# Allegro board BP2_02V5.brd
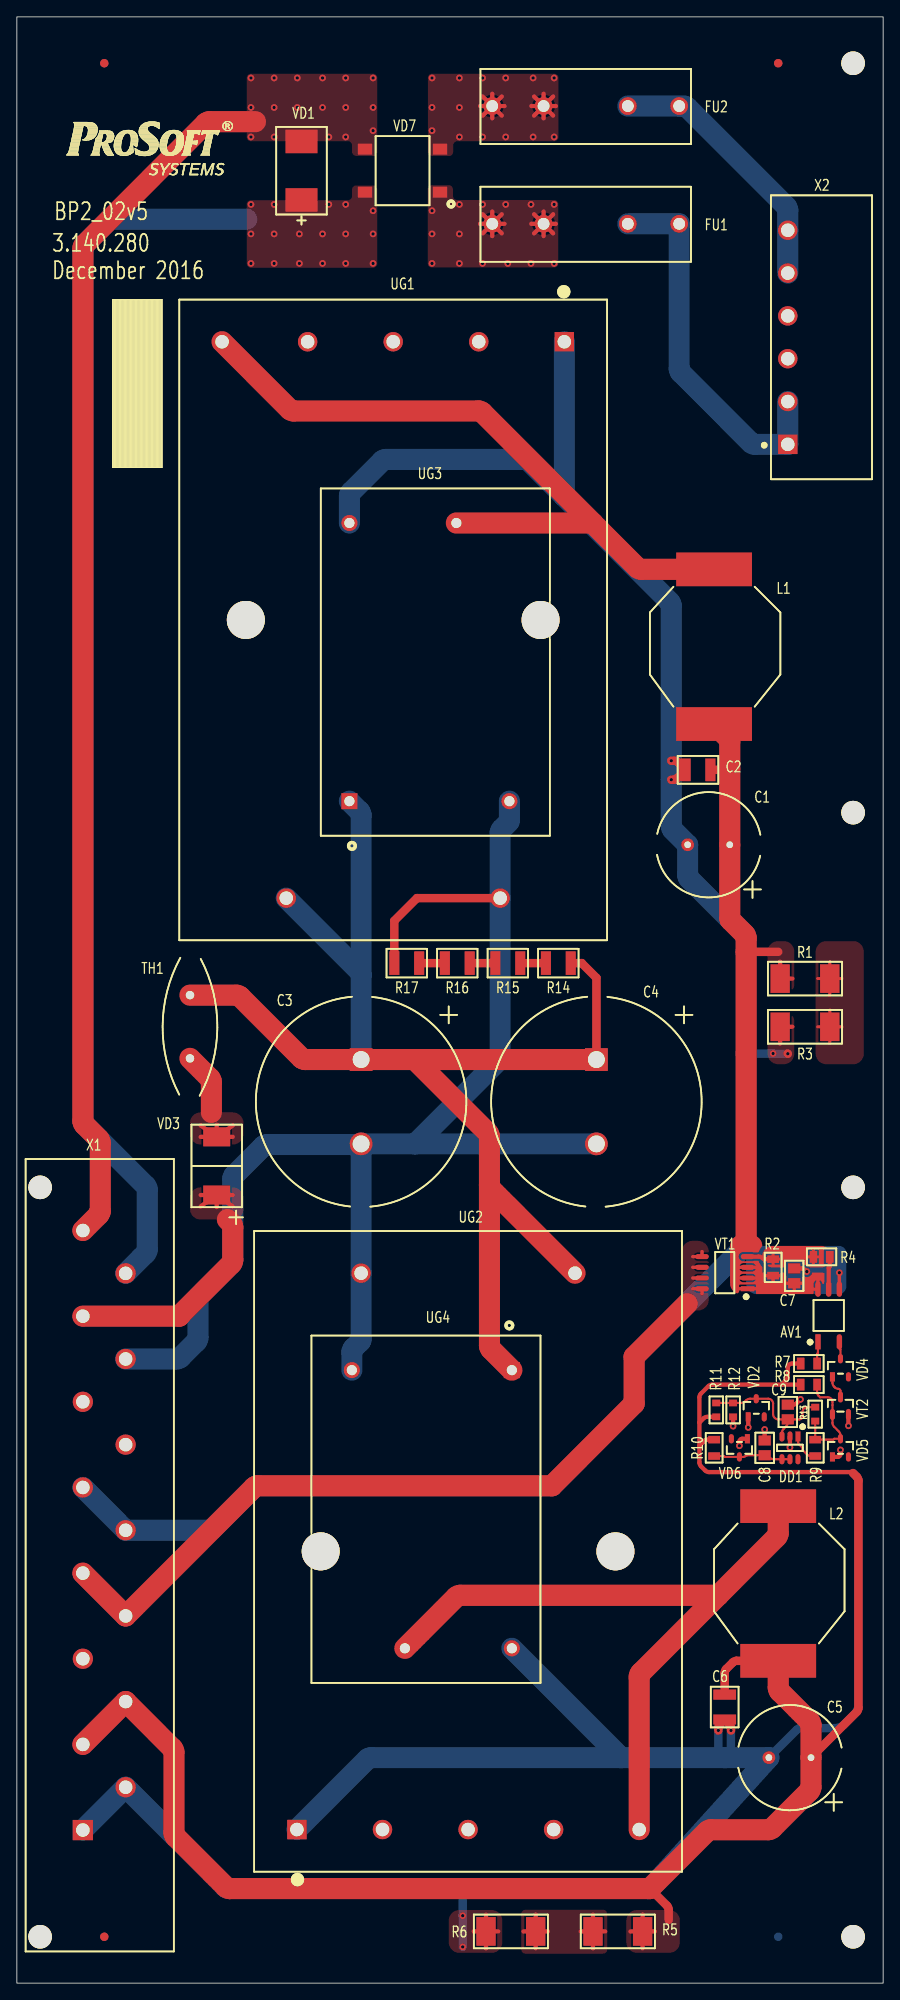
[diagram p0: board, top side]
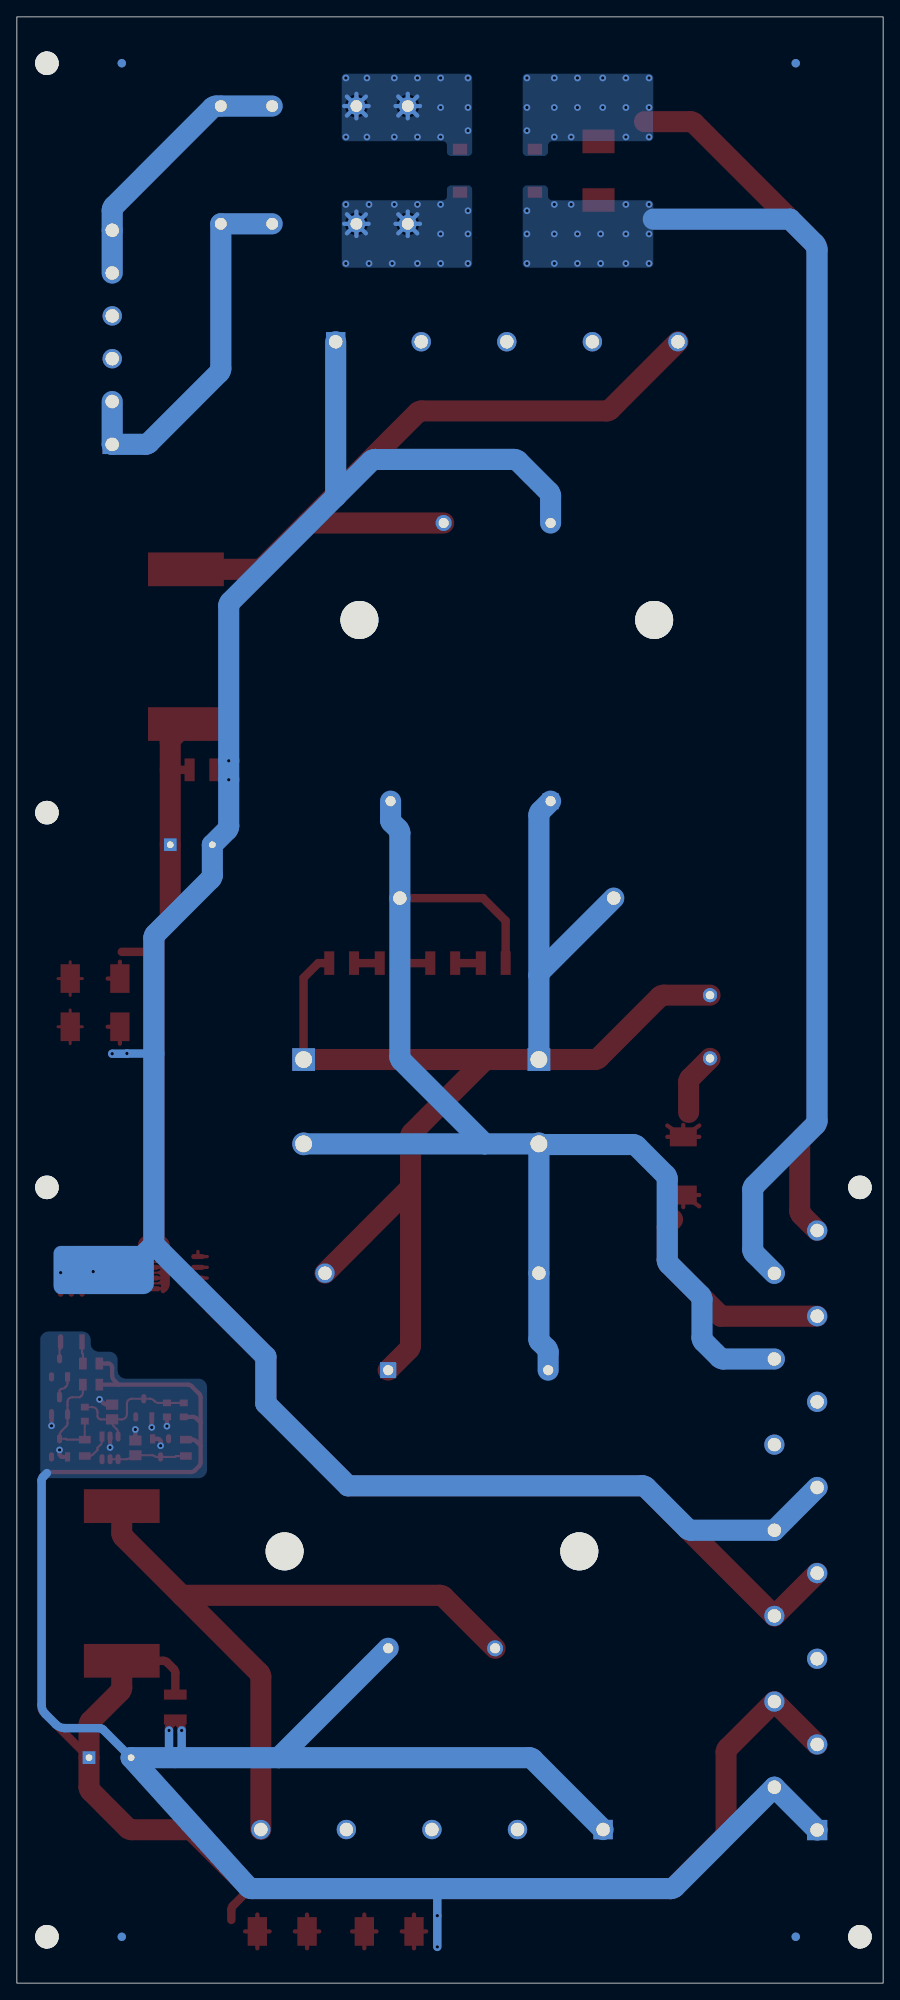
[diagram p1: board, bottom side, seen from below]

Outline 102.87 x 233.25 mm; copper layers: TOP, BOTTOM. Coordinates in mm from the lower left corner of the outline.
Outline path: rectangle 0,0 102.87,233.25

## Design rules (mm)
net group 220V: nets -UB N176971 N176987 N178384

## Placement (name value [footprint] x y rotation side)
AV1  ACPL-M50L-500E  [SOIC127P700X250-6N]  96.4 79.2 90 top
C1  470uF  [CAPPRR500W60L1250T1250H2000N]  82.16 135.04 180 top
C2  10uF  [CAPC3225X250N]  80.88 143.93 180 top
C3  100uF  [CAPPRR1000W55L2500T2500H2500N]  40.88 104.56 270 top
C4  100uF  [CAPPRR1000W55L2500T2500H2500N]  68.82 104.56 270 top
C5  470uF  [CAPPRR500W60L1250T1250H2000N]  91.8 26.75 180 top
C6  10uF  [CAPC3225X250N]  84.05 32.75 270 top
C7  0.1uF  [CAPC2012X130N]  92.3 83.91 90 top
C8  0.01uF  [CAPC2012X130N]  88.8 63.5 90 top
C9  0.01uF  [CAPC2012X130N]  91.55 67.75 90 top
DD1  TPS3702AX33DDC  [SOT95P280X110-6N]  91.8 63.5 270 top
FU1  3A  [SOCKET_ZH266]  67.55 208.7 180 top
FU2  3A  [SOCKET_ZH266]  67.55 222.67 180 top
L1  4.7uH 8.5A  [INDC22090X700N]  82.79 158.53 270 top
L2  4.7uH 8.5A  [INDC22090X700N]  90.41 47.41 270 top
NOREF  -  [unnamed]  10.38 227.75 0 top
NOREF#2  -  [#2]  102.87 0 90 top
NOREF#3  -  [unnamed#2]  99.3 138.85 0 top
NOREF#4  -  [#2]  14.3 189.75 270 top
NOREF#5  -  [unnamed]  10.38 5.5 0 top
NOREF#6  -  [unnamed#2]  99.3 227.75 0 top
NOREF#7  -  [#2]  5.3 213.75 0 top
NOREF#8  -  [unnamed#2]  99.3 94.4 0 top
NOREF#9  -  [#2]  0 233.25 0 top
NOREF#10  -  [unnamed]  90.41 227.75 0 top
NOREF#11  -  [unnamed#2]  99.3 5.5 0 top
NOREF#12  -  [unnamed]  90.41 227.75 180 bottom
NOREF#13  -  [unnamed]  10.38 5.5 180 bottom
NOREF#14  -  [unnamed]  90.41 5.5 180 bottom
NOREF#15  -  [unnamed]  10.38 227.75 180 bottom
R1  20  [RESC6432X55N]  93.58 119.17 0 top
R2  10k  [RESC2013X50N]  89.8 84.91 270 top
R3  20  [RESC6432X55N]  93.58 113.45 180 top
R4  100  [RESC2013X50N]  95.55 86.16 180 top
R5  470  [RESC6432X55N]  71.36 6.13 180 top
R6  470  [RESC6432X55N]  58.66 6.13 0 top
R7  1k  [RESC2013X50N]  94.05 73.5 0 top
R8  10k  [RESC2013X50N]  94.05 71 0 top
R9  100  [RESC2013X50N]  94.8 63.5 270 top
R10  10k  [RESC2013X50N]  82.8 63.5 270 top
R11  10.0k  [RESC1608X45N]  83.05 68 270 top
R12  2.0k  [RESC1608X45N]  85.05 68 90 top
R13  20.0k  [RESC1608X45N]  94.8 67.5 270 top
R14  33k  [RESC3226X55N]  64.3 121 0 top
R15  33k  [RESC3226X55N]  58.3 121 0 top
R16  33k  [RESC3226X55N]  52.3 121 0 top
R17  33k  [RESC3226X55N]  46.3 121 0 top
TH1  47  [RESRB750W80L1750T650H2300]  20.56 113.45 270 top
UG1  PMA15 S05  [DIP1016P6600X2250-10N]  44.69 161.71 270 top
UG2  PMA15 S24  [DIP1016P6600X2250-10N]  53.58 51.22 90 top
UG3  TMG 15105  [DIP1900P3300X1910-4N]  49.69 156.71 90 top
UG4  TMG 15124  [DIP1900P3300X1910-4N]  48.58 56.22 270 top
VD1  1.5SMC400A  [DIOM7959X262N]  33.8 215 270 top
VD2  4V7  [SOT95P230X110-3N]  87.8 68.25 90 top
VD3  S3M  [DIOM7959X265N]  23.73 96.94 270 top
VD4  15V  [SOT95P230X110-3N]  97.8 73 90 top
VD5  4V7  [SOT95P230X110-3N]  97.8 63.5 90 top
VD6  4V7  [SOT95P230X110-3N]  85.8 63.5 270 top
VD7  DF10S  [SOT510P985X260-4N]  45.8 215 180 top
VT1  IRF7410  [SOIC127P600X175-8N]  84.06 84.28 180 top
VT2  IRLML2060  [SOT95P237X112-3N]  97.8 68.5 90 top
X1  09061152911  [DIN41612-H15]  7.84 18.16 270 top
X2  231-536/001-000  [WAGO_231-536]  91.55 182.54 90 top

## Library data of the parts
AV1 = ACPL-M50L
C1 C3-C5 = CAPACITOR_POL
C2 C6-C9 = CAPACITOR
DD1 = TPS3702
FU1 FU2 = HOLDER
L1 L2 = INDUCTOR_F
R1 R3 R5 R6 = R_1W
R2 R4 R7-R13 = R_0.125W
R14-R17 = R_0.5W
TH1 = THERMISTOR
UG1 UG2 = MTM_PMA_S
UG3 UG4 = TRACO_TMG_15
VD1 = SUPRESSOR_POL
VD2 VD4-VD6 = STAB_3
VD3 = DIODE
VD7 = DIOD_MOST_0
VT1 = IRF7410_v2
VT2 = MOS_n_channel_induced_1
X1 = DIN41612-H15_8
X2 = CONN6_1

## Footprints (pads in the part's own frame, mm; a bottom-side part is the same pattern mirrored in y, then rotated)
CAPC2012X130N
  rect 1.2x1.45 smd: 1(-0.875,0) 2(0.875,0)
CAPC3225X250N
  rect 1.2x2.7 smd: 1(-1.475,0) 2(1.475,0)
CAPPRR500W60L1250T1250H2000N
  rect 1.5x1.5 hole 0.8: 1(-2.5,0)
  round 1.5 hole 0.8: 2(2.5,0)
CAPPRR1000W55L2500T2500H2500N
  rect 2.7x2.7 hole 2: 1(-5,0)
  round 2.7 hole 2: 2(5,0)
DIN41612-H15
  round 2.8 hole 2.8 unplated: (-76.24,-5.08) (12.66,-5.08)
  rect 2.4x2.4 hole 1.6: 4(0,0)
  round 2.4 hole 1.6: 6(-5.08,5.08) 8(-10.16,0) 10(-15.24,5.08) 12(-20.32,0) 14(-25.4,5.08) 16(-30.48,0) 18(-35.56,5.08) 20(-40.64,0) 22(-45.72,5.08) 24(-50.8,0) 26(-55.88,5.08) 28(-60.96,0) 30(-66.04,5.08) 32(-71.12,0)
DIOM7959X262N
  rect 2.794x3.81 smd: 1(-3.475,0) 2(3.475,0)
DIOM7959X265N
  rect 2.26x3.2 smd: 1(-3.45,0) 2(3.45,0)
DIP1016P6600X2250-10N
  round 4.5 hole 4.5: (0,17.5) (0,-17.5)
  rect 2.3x2.3 hole 1.6: 1(-33,20.32)
  round 2.3 hole 1.6: 2(-33,10.16) 3(-33,0) 4(-33,-10.16) 5(-33,-20.32) 6(33,-12.7) 7(33,12.7)
DIP1900P3300X1910-4N
  rect 1.9x1.9 hole 1.2: 1(-16.5,10.2)
  round 1.9 hole 1.2: 2(-16.5,-8.8) 3(16.5,10.2) 4(16.5,-2.5)
INDC22090X700N
  rect 4x9 smd: 1(-9.175,0) 2(9.175,0)
RESC1608X45N
  rect 0.8x0.95 smd: 1(-0.825,0) 2(0.825,0)
RESC2013X50N
  rect 0.9x1.4 smd: 1(-0.975,0) 2(0.975,0)
RESC3226X55N
  rect 1.2x2.8 smd: 1(-1.475,0) 2(1.475,0)
RESC6432X55N
  rect 2.3x3.4 smd: 1(-2.95,0) 2(2.95,0)
RESRB750W80L1750T650H2300
  round 1.7 hole 1: 1(-3.75,0) 2(3.75,0)
SOCKET_ZH266
  round 2.1 hole 1.4: 1(-11.1,0) 2(-5,0) 3(5,0) 4(11.1,0)
SOIC127P600X175-8N
  rect 1.6x0.6 smd: 1(-2.7,1.905)
  oval 1.6x0.6 smd: 2(-2.7,0.635) 3(-2.7,-0.635) 4(-2.7,-1.905) 5(2.7,-1.905) 6(2.7,-0.635) 7(2.7,0.635) 8(2.7,1.905)
SOIC127P700X250-6N
  rect 1.8x0.64 smd: 1(-3.125,1.27)
  oval 1.8x0.64 smd: 3(-3.125,-1.27) 4(3.125,-1.27) 5(3.125,0) 6(3.125,1.27)
SOT95P230X110-3N
  rect 1.1x0.6 smd: 1(-1.075,0.95)
  oval 1.1x0.6 smd: 2(-1.075,-0.95) 3(1.075,0)
SOT95P237X112-3N
  oval 1.3x0.6 smd: 1(-1.035,0.95) 2(-1.035,-0.95) 3(1.035,0)
SOT95P280X110-6N
  rect 1.2x0.6 smd: 1(-1.35,0.95)
  oval 1.2x0.6 smd: 2(-1.35,0) 3(-1.35,-0.95) 4(1.35,-0.95) 5(1.35,0) 6(1.35,0.95)
SOT510P985X260-4N
  rect 1.7x1.3 smd: 1(-4.45,2.55) 2(-4.45,-2.55) 3(4.45,-2.55) 4(4.45,2.55)
unnamed
  round 1 smd: (0,0)
unnamed#2
  round 2.8 hole 2.8 unplated: (0,0)
WAGO_231-536
  rect 2.3x2.3 hole 1.6: 1(0,0)
  round 2.3 hole 1.6: 2(5.08,0) 3(10.16,0) 4(15.24,0) 5(20.32,0) 6(25.4,0)

## Nets
4V7: C8.1 DD1.4(SET) DD1.5(VDD) R10.2 VD6.3(CATHODE)
GND: AV1.4(GND) C1.2 C2.2 C7.2 R3.2 UG1.1(GND) UG3.3(-VOUT) X1.18(GND#18) X1.20(GND#20)
GNDE: C5.2 C6.2 C8.2 C9.2 DD1.2(GND) R6.1 R12.1 UG2.1(GND) UG4.3(-VOUT) VD2.1(ANODE) VD5.1(ANODE) VD6.1(ANODE) VT2.2(S) X1.4(GNDE#4) X1.6(GNDE#6)
+5B: VT1.5(D5) VT1.6(D6) VT1.7(D7) VT1.8(D8) X1.14(+5B#14) X1.16(+5B#16)
+5BO: AV1.6(VCC) C1.1 C2.1 C7.1 L1.2 R1.1 R2.2 VT1.1(S1) VT1.2(S2) VT1.3(S3)
+24BE: C5.1 C6.1 L2.2 R5.1 R7.1 R8.1 R10.1 R11.2 X1.8(+24BE#8) X1.10(+24BE#10)
+UB: VD3.2(ANODE) X1.28(+UB)
-UB: C3.2 C4.2 R17.1 UG1.7(IN_2) UG2.7(IN_2) UG3.2(AC_N) UG4.2(AC_N) X1.26(-UB)
SENSE: C9.1 DD1.3(SENSE) R11.1 R12.2 R13.1 VD2.3(CATHODE)
N176971: FU2.1 FU2.2 X2.5(+BAT#5) X2.6(+BAT#6)
N176987: FU1.1 FU1.2 X2.1(-BAT#1) X2.2(-BAT#2)
N177007: VD1.1(CATHODE) VD7.3(+) X1.32(+BAT)
N178384: C3.1 C4.1 R14.2 TH1.1 UG1.6(IN_1) UG2.6(IN_1) UG3.1(AC_L) UG4.1(AC_L)
N178436: R2.1 R4.2 VT1.4(G)
N178472: L1.1 UG1.5(+U1) UG3.4(+VOUT)
N178504: L2.1 UG2.5(+U1) UG4.4(+VOUT)
N179228: AV1.5(VO) R4.1
N200865: R1.2 R3.1
N201462: R5.2 R6.2
N205115: TH1.2 VD3.1(CATHODE)
N216387: AV1.1(ANODE) R7.2
N216394: AV1.3(CATHODE) VD4.3(CATHODE)
N216620: R8.2 R9.1 R13.2 VD5.3(CATHODE) VT2.1(G)
N216713: DD1.1(UV) R9.2
N220477: VD4.1(ANODE) VT2.3(D)
N230446: FU2.3 FU2.4 VD7.2(IN2)
N230450: FU1.3 FU1.4 VD7.1(IN1)
N230454: VD1.2(ANODE) VD7.4(-) X1.30(-BAT)
N235975: R14.1 R15.2
N235979: R15.1 R16.2
N236417: R16.1 R17.2

Pads without a net: DD1 6; UG1 2 3 4; UG2 2 3 4; VD2 2; VD4 2; VD5 2; VD6 2; X1 12 22 24; X2 3 4

## Via types
v1: diameter 0.8, hole 0.4, TOP to BOTTOM, 80 vias

## Routing (per net, layer and track width the routed paths; a pad name or vN(x,y) marks a point on that pad's centre or on a via; arc(x,y) is an arc through that point)
4V7: length 9.2
  TOP w0.25: DD1.5 DD1.4 89.86,62.15 arc(89.62,62.2) 89.41,62.34 89.31,62.44 arc(89.11,62.58) 88.86,62.62 C8.1 86.77,62.62 arc(86.64,62.6) 86.52,62.52 arc(86.41,62.45) 86.28,62.42 VD6.3 84.05,62.42 83.95,62.52 R10.2
GND: length 264.6
  TOP w0.4: v1(97.67,84.28) AV1.4
  TOP w0.5: v1(93.8,84.41) 93.62,84.59 arc(93.41,84.73) 93.17,84.78 C7.2 ; 92.09,113.45 R3.2 90.63,111.45
  TOP w1: v1(77.71,142.75) 77.97,142.75 arc(78.21,142.8) 78.42,142.94 C2.2 78.53,144.81 arc(78.32,144.95) 78.08,145 v1(77.71,145) ; 91.52,110.28 v1(91.55,110.25)
  BOTTOM w1: v1(91.55,110.25) 89.83,110.25 v1(89.8,110.28) 86.6,110.28
  BOTTOM w2.5: 87.9,86.3 86.6,87.6 86.6,87.62 ; 86.6,87.62 73.3,74.32 73.3,68.75 63.55,59 28.6,59 arc(28.36,58.95) 28.15,58.81 23.25,53.91 arc(23.04,53.77) 22.8,53.72 X1.18 X1.20 ; 86.6,87.62 86.6,123.98 arc(86.55,124.23) 86.41,124.43 79.84,131 arc(79.7,131.21) 79.66,131.45 C1.2 77.9,136.8 arc(77.76,137.01) 77.71,137.25 v1(77.71,142.75) v1(77.71,145) 77.71,163.39 arc(77.66,163.63) 77.52,163.84 65.01,176.35 ; 65.01,176.35 UG1.1 ; 65.01,176.35 60.8,180.56 arc(60.6,180.7) 60.35,180.75 43.81,180.75 arc(43.57,180.7) 43.36,180.56 39.68,176.88 arc(39.54,176.67) 39.49,176.43 UG3.3
GNDE: length 249.7
  TOP w0.5: v1(93.05,69.25) 92.61,68.81 arc(92.41,68.67) 92.16,68.62 C9.2 ; R12.1 v1(85.05,66.08) ; R6.1 57.16,6.13 ; R6.1 54.26,6.13 ; R6.1 55.71,8.14 ; R6.1 55.71,4.13 ; v1(85.8,63.75) 85.8,64.25 arc(85.9,64.48) 86.12,64.58 VD6.1 ; VD5.1 97.47,62.42 arc(97.7,62.52) 97.8,62.75 v1(97.8,63.25) ; VD2.1 v1(86.85,65.92) ; C8.2 v1(88.8,65.67) ; VT2.2 v1(98.75,66.12) ; DD1.2 v1(91.8,63.55)
  TOP w1: v1(84.8,29.98) 84.8,30.26 arc(84.75,30.51) 84.61,30.71 C6.2 83.49,30.71 arc(83.35,30.51) 83.3,30.26 v1(83.3,29.98)
  BOTTOM w1: v1(52.95,4.3) v1(52.95,8) 52.95,11.21 ; 99.3,60.5 99.75,60.05 arc(99.89,59.84) 99.94,59.6 99.94,33.01 arc(99.82,32.43) 99.5,31.95 98.24,30.69 arc(97.75,30.36) 97.18,30.25 93.06,30.25 arc(92.82,30.2) 92.61,30.06 C5.2 ; v1(84.8,29.98) 84.8,27.71 arc(84.75,27.47) 84.61,27.26 84.1,26.75 83.49,27.36 arc(83.35,27.57) 83.3,27.81 v1(83.3,29.98)
  BOTTOM w2.5: X1.4 X1.6 24.76,11.4 arc(24.96,11.26) 25.21,11.21 74.95,11.21 arc(75.19,11.26) 75.4,11.4 C5.2 71.75,26.75 ; 71.75,26.75 42.05,26.75 arc(41.81,26.7) 41.6,26.56 UG2.1 ; 71.75,26.75 UG4.3
+5B: length 98
  TOP w0.4: 80.26,82.38 VT1.8 81.36,81.77 ; 80.26,84.92 VT1.6 ; 80.26,83.64 VT1.7 ; 80.26,86.19 VT1.5 81.36,86.79
  TOP w2.5: 79.6,80.6 73.3,74.3 73.3,68.75 63.55,59 28.62,59 arc(28.38,58.95) 28.17,58.81 X1.14 X1.16
+5BO: length 86.4
  TOP w0.4: 85.66,83.64 VT1.2 87.87,83.64 ; 95.13,83.53 AV1.6 94.51,82.33 ; 87.87,84.92 VT1.3 85.66,84.92 ; 88.8,83.93 R2.2 ; R2.2 89.8,83.18 ; R2.2 90.81,83.93 ; 91.28,83.03 C7.1 ; C7.1 92.3,82.13 ; C7.1 93.33,83.03 ; 85.66,82.38 VT1.1 87.87,82.38
  TOP w0.5: 90.63,121.17 R1.1 92.09,119.17
  TOP w1: C2.1 84.58,143.93 84.66,144 ; 90.41,122.34 86.6,122.34
  TOP w2.5: L1.2 84.47,147.68 arc(84.61,147.47) 84.66,147.23 C1.1 84.66,126.32 arc(84.68,126.2) 84.75,126.1 86.41,124.43 arc(86.55,124.23) 86.6,123.98 86.6,88.2
+24BE: length 230.4
  TOP w0.5: 74.31,6.13 74.31,8.14 ; 74.31,6.13 74.31,4.13 ; 74.31,6.13 75.76,6.13 ; 74.31,6.13 72.86,6.13 ; 81.05,66.5 81.05,69.49 arc(81.1,69.73) 81.24,69.94 82.11,70.81 arc(82.32,70.95) 82.56,71 90.8,71 ; 81.05,66.5 81.54,66.99 arc(81.74,67.13) 81.99,67.17 R11.2 ; 81.05,66.5 81.05,63.75 ; 90.8,71 91.36,71.56 arc(91.5,71.77) 91.55,72.01 91.55,73 arc(91.7,73.35) 92.05,73.5 R7.1 ; 90.8,71 R8.1 ; 81.05,63.75 81.05,61.76 arc(81.1,61.52) 81.24,61.31 81.74,60.81 arc(81.94,60.67) 82.19,60.62 99.17,60.62 99.3,60.5 ; 81.05,63.75 81.59,64.29 arc(81.79,64.43) 82.04,64.47 R10.1
  TOP w1: 99.3,60.5 99.75,60.05 arc(99.89,59.84) 99.94,59.6 99.94,32.65 arc(99.89,32.4) 99.75,32.2 C5.1 ; 77.4,7.5 77.4,8.72 arc(77.35,8.97) 77.21,9.17 75.17,11.21 ; C6.1 84.05,36.81 arc(84.1,37.06) 84.24,37.26 85.02,38.05 arc(85.23,38.19) 85.47,38.23 L2.2
  TOP w2.5: X1.8 X1.10 18.47,27.85 arc(18.61,27.65) 18.66,27.4 18.66,17.83 arc(18.7,17.59) 18.84,17.38 24.82,11.4 arc(25.02,11.26) 25.27,11.21 75.17,11.21 81.97,18.01 arc(82.17,18.15) 82.42,18.2 89.25,18.2 arc(89.49,18.25) 89.7,18.39 94.11,22.8 arc(94.25,23.01) 94.3,23.25 C5.1 94.3,30.63 arc(94.25,30.88) 94.11,31.08 90.6,34.6 arc(90.46,34.81) 90.41,35.05 L2.2
+UB: length 35.7
  TOP w0.5: VD3.2 25.64,92.15 ; VD3.2 21.83,93.49 ; VD3.2 23.73,92.06 ; VD3.2 21.83,92.15 ; VD3.2 25.64,93.49
  TOP w2.5: X1.28 19.29,79.12 19.29,79.16 25.45,85.32 arc(25.59,85.53) 25.64,85.77 25.64,89.69 arc(25.59,89.93) 25.45,90.14 25,90.59
-UB: length 166.4
  TOP w1: R17.1 44.82,126.03 47.51,128.71 UG1.7
  BOTTOM w2.5: C3.2 40.8,99.48 29.71,99.48 arc(29.47,99.43) 29.26,99.29 25.83,95.86 arc(25.69,95.65) 25.64,95.41 25.64,85.77 arc(25.59,85.53) 25.45,85.32 21.7,81.57 arc(21.56,81.36) 21.51,81.12 21.51,76.56 arc(21.46,76.32) 21.33,76.12 19.44,74.23 arc(19.23,74.09) 18.99,74.04 X1.26 ; C3.2 UG2.7 40.88,76.35 arc(40.86,76.23) 40.79,76.13 39.97,75.31 arc(39.83,75.1) 39.78,74.86 UG4.2 ; C3.2 47.31,99.56 ; 47.31,99.56 57.2,109.45 arc(57.34,109.66) 57.39,109.9 UG1.7 57.39,136.45 arc(57.44,136.69) 57.58,136.9 58.4,137.72 arc(58.47,137.82) 58.49,137.94 UG3.2 ; 47.31,99.56 C4.2
SENSE: length 17.1
  TOP w0.25: C9.1 91.55,66.51 arc(91.5,66.27) 91.36,66.06 91.04,65.74 arc(90.9,65.53) 90.85,65.29 DD1.3 ; C9.1 90.42,66.88 arc(89.98,67.06) 89.8,67.5 89.8,68.75 arc(89.63,69.16) 89.22,69.33 VD2.3 87.06,69.33 arc(86.82,69.28) 86.61,69.14 86.49,69.01 arc(86.28,68.87) 86.04,68.83 R12.2 R11.1 ; C9.1 92.92,66.88 arc(93.19,66.98) 93.3,67.25 93.3,67.75 arc(93.47,68.16) 93.88,68.33 R13.1
N176971: length 31.7
  BOTTOM w2.5: 91.55,202.86 91.55,210.31 arc(91.5,210.56) 91.36,210.76 79.64,222.48 arc(79.43,222.62) 79.19,222.67 FU2.1 FU2.2
N176987: length 45.1
  BOTTOM w2.5: X2.2 X2.1 87.62,182.54 arc(87.38,182.59) 87.18,182.72 78.84,191.06 arc(78.7,191.27) 78.65,191.51 FU1.1 FU1.2
N177007: length 145
  TOP w2.5: 28.34,220.82 22.88,220.82 arc(22.64,220.77) 22.43,220.63 8.03,206.23 arc(7.89,206.02) 7.84,205.78 7.84,102.28 arc(7.89,102.04) 8.03,101.83 9.72,100.14 arc(9.86,99.93) 9.91,99.69 9.91,91.58 arc(9.88,91.45) 9.81,91.34 9.71,91.24 9.71,91.15 X1.32
  vias: v1(27.8,226) v1(27.8,222.5) v1(27.8,219) v1(30.55,226) v1(30.55,222.5) v1(30.55,219) v1(33.3,226) v1(33.3,222.5) v1(36.3,226) v1(36.3,222.5) v1(37.05,219) v1(39.05,226) v1(39.05,222.5) v1(39.05,219) v1(42.3,226) v1(42.3,222.5) v1(42.3,219.75)
N178384: length 165
  TOP w1: C4.1 68.82,119.25 67.07,121 R14.2
  TOP w2.5: 56.12,94.64 56.12,100.41 arc(56.07,100.65) 55.93,100.86 47.23,109.56 ; 56.12,94.64 56.12,75.64 arc(56.17,75.4) 56.31,75.19 UG4.1 ; 56.12,94.64 arc(56.17,94.4) 56.31,94.19 UG2.6 ; 47.23,109.56 C3.1 34.24,109.56 arc(34,109.61) 33.79,109.75 26.52,117.01 arc(26.32,117.15) 26.07,117.2 TH1.1 ; 47.23,109.56 C4.1
  BOTTOM w2.5: 40.88,119.56 C3.1 ; 40.88,119.56 40.88,138.56 arc(40.83,138.8) 40.69,139.01 UG3.1 ; 40.88,119.56 arc(40.83,119.8) 40.69,120.01 UG1.6
N178436: length 9.1
  TOP w0.35: 93.83,86.16 R4.2 ; R4.2 95.33,86.16 ; R4.2 94.58,87.16 ; R4.2 94.58,85.15 ; 89.8,85.13 R2.1 ; R2.1 90.81,85.88 ; R2.1 89.8,86.63
  TOP w0.5: R2.1 88.82,85.88 arc(88.67,85.91) 88.54,86 arc(88.33,86.14) 88.09,86.19 VT1.4
N178472: length 85.7
  TOP w2.5: L1.1 74.14,167.71 arc(73.9,167.76) 73.69,167.9 68.38,173.21 ; UG1.5 32.39,186.69 arc(32.6,186.55) 32.84,186.5 54.82,186.5 arc(55.07,186.45) 55.27,186.31 68.38,173.21 ; 68.38,173.21 UG3.4
N178504: length 84.9
  TOP w2.5: UG4.4 52.18,45.82 arc(52.39,45.96) 52.63,46.01 83.29,46.01 ; L2.1 90.41,53.39 arc(90.36,53.15) 90.22,52.94 83.29,46.01 ; UG2.5 73.9,36.35 arc(73.95,36.59) 74.09,36.8 83.29,46.01
N179228: length 3.9
  TOP w0.5: AV1.5 96.4,84.88 96.53,85 R4.1
N200865: length 13.8
  TOP w0.35: 95.08,113.45 R3.1 ; R3.1 96.53,115.45 ; R3.1 97.99,113.45 ; R3.1 96.53,111.45 ; R1.2 96.53,121.17 ; R1.2 95.08,119.17 ; R1.2 96.53,117.16 ; R1.2 97.99,119.17
N201462: length 13.8
  TOP w0.5: 66.96,6.13 R5.2 ; R5.2 68.41,8.14 ; R5.2 69.86,6.13 ; R5.2 68.41,4.13 ; R6.2 63.06,6.13 ; R6.2 61.61,4.13 ; R6.2 61.61,8.14 ; R6.2 60.16,6.13
N205115: length 17.3
  TOP w0.5: 21.83,101.73 VD3.1 ; VD3.1 21.83,100.39 ; VD3.1 23.73,101.82 ; VD3.1 25.64,100.39 ; VD3.1 25.64,101.73
  TOP w2.5: 23.1,103.29 23.1,106.9 arc(23.05,107.14) 22.91,107.35 TH1.2
N216387: length 2.6
  TOP w0.25: AV1.1 95.12,74.75 95.02,74.65 R7.2
N216394: length 2.1
  TOP w0.25: AV1.3 97.66,75.31 97.8,75.17 VD4.3
N216620: length 13.4
  TOP w0.25: R13.2 R9.1 96.95,64.47 97.05,64.58 VD5.3 97.8,64.99 arc(97.75,65.23) 97.61,65.44 97.04,66.01 arc(96.9,66.22) 96.85,66.46 VT2.1 96.85,68.95 arc(96.69,69.34) 96.3,69.5 95.38,69.5 95.21,69.66 arc(95.07,69.87) 95.02,70.11 R8.2
N216713: length 3.6
  TOP w0.25: R9.2 94.29,62.52 arc(94.04,62.57) 93.84,62.71 93.3,63.25 93.3,63.5 92.94,63.86 arc(92.8,64.07) 92.75,64.31 DD1.1
N220477: length 2.9
  TOP w0.25: VT2.3 97.8,70.25 arc(97.73,70.43) 97.55,70.5 arc(97.32,70.55) 97.12,70.68 97.04,70.76 arc(96.9,70.97) 96.85,71.21 VD4.1
N230446: length 48.7
  TOP w0.5: FU2.3 63.68,221.54 ; FU2.3 61.42,223.8 ; FU2.3 61.42,221.54 ; FU2.3 63.68,223.8 ; FU2.3 62.55,224.12 ; FU2.3 61.1,222.67 ; FU2.3 62.55,221.22 ; FU2.3 64,222.67 ; 55.32,221.54 FU2.4 ; FU2.4 57.9,222.67 ; FU2.4 57.58,221.54 ; FU2.4 57.58,223.8 ; FU2.4 56.45,224.12 ; FU2.4 55,222.67 ; FU2.4 56.45,221.22 ; FU2.4 55.32,223.8
  BOTTOM w0.5: FU2.4 57.9,222.67 ; FU2.4 55.32,221.54 ; FU2.4 57.58,221.54 ; FU2.4 55,222.67 ; FU2.4 57.58,223.8 ; FU2.4 56.45,224.12 ; FU2.4 55.32,223.8 ; FU2.4 56.45,221.22 ; FU2.3 64,222.67 ; FU2.3 61.42,223.8 ; FU2.3 61.42,221.54 ; FU2.3 63.68,221.54 ; FU2.3 62.55,221.22 ; FU2.3 63.68,223.8 ; FU2.3 61.1,222.67 ; FU2.3 62.55,224.12
  vias: v1(49.3,226) v1(49.3,222.5) v1(49.3,219.75) v1(52.55,226) v1(52.55,222.5) v1(52.55,219) v1(55.3,226) v1(55.3,219) v1(58.05,226) v1(58.05,219) v1(61.3,226) v1(61.3,219) v1(63.8,226) v1(63.8,219)
N230450: length 48.7
  TOP w0.5: 61.42,209.83 FU1.3 ; FU1.3 61.1,208.7 ; FU1.3 61.42,207.57 ; FU1.3 62.55,210.15 ; FU1.3 64,208.7 ; FU1.3 63.68,209.83 ; FU1.3 63.68,207.57 ; FU1.3 62.55,207.25 ; 56.45,207.25 FU1.4 ; FU1.4 57.58,209.83 ; FU1.4 55.32,207.57 ; FU1.4 56.45,210.15 ; FU1.4 55.32,209.83 ; FU1.4 57.58,207.57 ; FU1.4 57.9,208.7 ; FU1.4 55,208.7
  BOTTOM w0.5: FU1.3 64,208.7 ; FU1.3 62.55,207.25 ; FU1.3 61.1,208.7 ; FU1.3 61.42,207.57 ; FU1.3 62.55,210.15 ; FU1.3 63.68,207.57 ; FU1.3 63.68,209.83 ; FU1.3 61.42,209.83 ; 56.45,207.25 FU1.4 ; FU1.4 55.32,209.83 ; FU1.4 56.45,210.15 ; FU1.4 55,208.7 ; FU1.4 57.9,208.7 ; FU1.4 57.58,207.57 ; FU1.4 57.58,209.83 ; FU1.4 55.32,207.57
  vias: v1(49.3,210.25) v1(49.3,207.5) v1(49.3,204) v1(52.55,211) v1(52.55,207.5) v1(52.55,204) v1(55.3,211) v1(55.3,204) v1(58.05,211) v1(58.3,204) v1(61.05,211) v1(61.05,204) v1(63.8,211) v1(63.8,204)
N230454: length 146.7
  BOTTOM w2.5: 27.3,209.25 11.05,209.25 8.17,206.37 arc(7.94,206.03) 7.86,205.62 7.86,102.28 arc(7.91,102.04) 8.05,101.83 15.3,94.58 arc(15.44,94.37) 15.49,94.13 15.49,87.03 arc(15.44,86.79) 15.3,86.58 X1.30
  vias: v1(27.8,211) v1(27.8,207.5) v1(27.8,204) v1(30.55,211) v1(30.55,207.5) v1(30.55,204) v1(33.55,207.5) v1(33.55,204) v1(36.3,207.5) v1(36.3,204) v1(37.05,211) v1(39.05,211) v1(39.05,207.5) v1(39.05,204) v1(42.3,210.25) v1(42.3,207.5) v1(42.3,204)
N235975: length 3
  TOP w1: R14.1 R15.2
N235979: length 3
  TOP w1: R15.1 R16.2
N236417: length 3
  TOP w1: R16.1 R17.2

## Copper pours and planes (outline as drawn; the poured copper is in the pictures)
GND on TOP: 89.14,110.28 89.51,109.38 90.41,109 91.05,109 91.94,109.38 92.31,110.28 92.31,114.08 91.94,114.98 91.05,115.36 90.41,115.36 89.51,114.98 89.14,114.08
GNDE on TOP: 51.29,4.87 51.66,3.97 52.56,3.59 56.37,3.59 57.27,3.97 57.64,4.87 57.64,7.41 57.27,8.3 56.37,8.68 52.56,8.68 51.66,8.3 51.29,7.41
GNDE on BOTTOM: 99.1,77.3 99.81,77.01 100.1,76.3 100.1,60.9 99.81,60.19 99.1,59.9 81.3,59.9 80.59,60.19 80.3,60.9 80.3,70.7 80.59,71.41 81.3,71.7 89.9,71.7 90.61,71.99 90.9,72.7 90.9,73.9 91.19,74.61 91.9,74.9 93.1,74.9 93.81,75.19 94.1,75.9 94.1,76.3 94.39,77.01 95.1,77.3
(no net) on TOP: 88.88,85.29 89.78,84.92 95.49,84.92 96.39,85.29 96.77,86.19 96.39,87.08 95.49,87.45 89.78,87.45 88.88,87.08 88.51,86.19
(no net) on BOTTOM: 86.6,83.01 86.98,82.11 87.88,81.74 97.83,81.74 98.32,82.11 98.5,82.7 98.5,86.5 98.26,87.17 97.61,87.45 87.88,87.45 86.98,87.08 86.6,86.19
+5B on TOP: 78.98,81.06 79.35,80.17 80.25,79.8 80.88,79.8 81.78,80.17 82.16,81.06 82.16,86.78 81.78,87.68 80.88,88.05 80.25,88.05 79.35,87.68 78.98,86.78
+5BO on TOP (solid shape): 87.24,88.72 87.29,88.72 87.39,88.72 87.49,88.7 87.58,88.68 87.68,88.65 87.77,88.61 87.86,88.56 87.94,88.51 88.02,88.45 88.1,88.39 88.17,88.32 88.24,88.24 88.29,88.16 88.35,88.08 88.39,87.99 88.43,87.9 88.46,87.8 88.49,87.71 88.5,87.61 88.51,87.51 88.5,87.42 88.44,87.35 88.36,87.25 88.29,87.15 88.23,87.04 88.17,86.93 88.12,86.81 88.09,86.72 88.04,86.69 87.5,86.69 87.44,86.71 87.37,86.73 87.3,86.74 87.27,86.74 86.27,86.74 86.23,86.74 86.17,86.73 86.1,86.71 86.04,86.69 85.98,86.66 85.92,86.62 85.87,86.58 85.83,86.53 85.79,86.47 85.76,86.41 85.74,86.35 85.72,86.28 85.71,86.22 85.71,86.15 85.72,86.09 85.74,86.02 85.76,85.96 85.79,85.9 85.83,85.84 85.87,85.79 85.92,85.75 85.98,85.71 86.04,85.68 86.1,85.66 86.17,85.64 86.23,85.63 86.27,85.63 87.27,85.63 87.3,85.63 87.37,85.64 87.44,85.66 87.5,85.68 88.04,85.68 88.09,85.65 88.12,85.56 88.17,85.44 88.23,85.33 88.29,85.22 88.36,85.12 88.44,85.02 88.5,84.95 88.51,84.91 88.51,84.38 88.52,84.34 88.53,84.32 88.55,84.3 88.57,84.29 88.84,84.27 88.86,84.26 88.88,84.24 88.9,84.22 88.9,84.18 88.9,83.38 88.91,83.34 88.92,83.32 88.94,83.3 88.96,83.29 89,83.28 90.61,83.28 90.65,83.29 90.67,83.3 90.69,83.32 90.7,83.34 90.71,83.38 90.71,84.18 90.71,84.22 90.73,84.24 90.75,84.26 90.77,84.27 90.81,84.28 91.23,84.28 91.27,84.27 91.29,84.26 91.31,84.24 91.32,84.22 91.33,83.98 91.37,83.92 91.38,83.89 91.38,82.33 91.39,82.29 91.4,82.27 91.42,82.25 91.44,82.24 91.48,82.23 93.13,82.23 93.17,82.24 93.19,82.25 93.21,82.27 93.22,82.29 93.23,82.33 93.23,83.64 93.24,83.68 93.25,83.7 93.44,83.83 93.5,83.83 93.55,83.8 93.62,83.78 93.69,83.76 93.76,83.75 93.83,83.75 93.9,83.76 93.96,83.77 94.03,83.79 94.1,83.82 94.16,83.86 94.21,83.9 94.27,83.94 94.31,83.99 94.35,84.05 94.39,84.11 94.42,84.18 94.44,84.24 94.49,84.28 95.49,84.28 95.55,84.28 95.66,84.27 95.77,84.25 95.86,84.22 95.88,84.2 95.89,84.18 95.9,84.14 95.9,83.19 95.87,83.12 95.85,83.05 95.82,82.97 95.8,82.95 95.78,82.94 95.75,82.93 95.73,82.93 95.7,82.94 95.68,82.95 95.66,82.97 95.64,83.04 95.61,83.1 95.59,83.16 95.55,83.21 95.51,83.26 95.47,83.31 95.41,83.34 95.36,83.38 95.3,83.4 95.24,83.42 95.17,83.43 95.11,83.43 95.05,83.42 94.98,83.41 94.92,83.39 94.87,83.36 94.81,83.32 94.76,83.28 94.72,83.23 94.68,83.18 94.65,83.12 94.63,83.06 94.62,83 94.61,82.94 94.61,82.91 94.61,81.84 94.6,81.8 94.59,81.78 94.57,81.76 94.55,81.75 94.51,81.74 87.87,81.74 87.83,81.75 87.81,81.76 87.79,81.78 87.77,81.8 87.77,81.84 87.77,82.78 87.76,82.82 87.75,82.84 87.73,82.86 87.71,82.87 87.67,82.88 85.86,82.88 85.82,82.87 85.8,82.86 85.78,82.84 85.77,82.82 85.76,82.78 85.76,82.02 85.76,82 85.75,81.97 85.73,81.95 85.72,81.94 85.57,81.84 85.54,81.83 85.5,81.83 85.44,81.85 85.35,81.9 85.27,81.95 85.19,82.01 85.11,82.08 85.04,82.15 84.97,82.22 84.91,82.3 84.86,82.39 84.82,82.48 84.78,82.57 84.75,82.66 84.72,82.76 84.71,82.86 84.7,82.96 84.7,83.01 84.7,83.64 85.76,83.64 85.77,83.58 85.78,83.52 85.8,83.46 85.82,83.4 85.86,83.35 85.9,83.3 85.94,83.26 86,83.22 86.05,83.19 86.11,83.17 86.17,83.15 86.23,83.14 86.27,83.14 87.27,83.14 87.3,83.14 87.36,83.15 87.42,83.17 87.48,83.19 87.53,83.22 87.59,83.26 87.63,83.3 87.67,83.35 87.71,83.4 87.73,83.46 87.75,83.52 87.76,83.58 87.77,83.64 87.76,83.71 87.75,83.77 87.73,83.83 87.71,83.89 87.67,83.94 87.63,83.99 87.59,84.03 87.53,84.07 87.48,84.1 87.42,84.12 87.36,84.14 87.3,84.15 87.27,84.15 86.27,84.15 86.23,84.15 86.17,84.14 86.11,84.12 86.05,84.1 86,84.07 85.94,84.03 85.9,83.99 85.86,83.94 85.82,83.89 85.8,83.83 85.78,83.77 85.77,83.71 85.76,83.64 84.7,83.64 84.7,84.92 85.76,84.92 85.77,84.85 85.78,84.79 85.8,84.73 85.82,84.67 85.86,84.62 85.9,84.57 85.94,84.53 86,84.49 86.05,84.46 86.11,84.44 86.17,84.42 86.23,84.41 86.27,84.41 87.27,84.41 87.3,84.41 87.36,84.42 87.42,84.44 87.48,84.46 87.53,84.49 87.59,84.53 87.63,84.57 87.67,84.62 87.71,84.67 87.73,84.73 87.75,84.79 87.76,84.85 87.77,84.92 87.76,84.98 87.75,85.04 87.73,85.1 87.71,85.16 87.67,85.21 87.63,85.26 87.59,85.3 87.53,85.34 87.48,85.37 87.42,85.39 87.36,85.41 87.3,85.42 87.27,85.42 86.27,85.42 86.23,85.42 86.17,85.41 86.11,85.39 86.05,85.37 86,85.34 85.94,85.3 85.9,85.26 85.86,85.21 85.82,85.16 85.8,85.1 85.78,85.04 85.77,84.98 85.76,84.92 84.7,84.92 84.7,87.45 84.7,87.5 84.71,87.6 84.72,87.7 84.75,87.8 84.78,87.89 84.82,87.99 84.86,88.08 84.91,88.16 84.97,88.24 85.04,88.32 85.11,88.39 85.18,88.45 85.26,88.51 85.35,88.56 85.44,88.61 85.53,88.65 85.63,88.68 85.72,88.7 85.82,88.72 85.92,88.72 85.97,88.72
+5BO on TOP: 89.14,118.53 89.51,117.63 90.41,117.26 91.05,117.26 91.94,117.63 92.31,118.53 92.31,122.34 91.94,123.24 91.05,123.61 90.41,123.61 89.51,123.24 89.14,122.34
+24BE on TOP: 72.38,4.87 72.75,3.97 73.65,3.59 77.46,3.59 78.36,3.97 78.73,4.87 78.73,7.41 78.36,8.3 77.46,8.68 73.65,8.68 72.75,8.3 72.38,7.41
+UB on TOP: 20.56,91.86 20.93,90.96 21.83,90.59 25.64,90.59 26.54,90.96 26.91,91.86 26.91,93.13 26.54,94.03 25.64,94.4 21.83,94.4 20.93,94.03 20.56,93.13
N177007 on TOP: 27.8,226.5 27.45,226.35 27.3,226 27.3,219 27.45,218.65 27.8,218.5 32.05,218.5 32.05,217.25 35.55,217.25 35.55,218.5 39.3,218.5 39.65,218.35 39.8,218 39.8,217.25 39.95,216.9 40.3,216.75 42.3,216.75 42.65,216.9 42.8,217.25 42.8,226 42.65,226.35 42.3,226.5
N177007 on BOTTOM: 27.8,226.5 27.45,226.35 27.3,226 27.3,219 27.45,218.65 27.8,218.5 39.3,218.5 39.65,218.35 39.8,218 39.8,217.25 39.95,216.9 40.3,216.75 42.3,216.75 42.65,216.9 42.8,217.25 42.8,226 42.65,226.35 42.3,226.5
N178436 on TOP (solid shape): 95.49,87.45 95.55,87.45 95.66,87.45 95.76,87.43 95.87,87.4 95.97,87.36 96.07,87.32 96.14,87.28 96.16,87.23 96.16,87.17 96.14,87.15 96.13,87.13 96.1,87.11 95.89,87.1 95.87,87.09 95.85,87.07 95.84,87.05 95.83,87.01 95.83,85.26 95.89,85.2 95.9,85.2 95.89,85.02 95.88,84.99 95.86,84.98 95.77,84.94 95.66,84.93 95.55,84.92 95.49,84.92 94.25,84.92 94.23,84.92 94.2,84.93 94.16,84.95 94.1,84.99 94.04,85.01 93.97,85.04 93.91,85.05 93.78,85.1 93.7,85.15 93.61,85.19 93.51,85.23 93.41,85.26 93.33,85.27 93.28,85.33 93.27,85.57 93.26,85.59 93.24,85.61 93.22,85.62 93.18,85.63 91.43,85.63 91.39,85.62 91.37,85.61 91.35,85.59 91.34,85.57 91.33,85.53 91.33,85.02 91.32,84.98 91.31,84.95 91.29,84.94 91.27,84.92 91.23,84.92 89.78,84.92 89.73,84.92 89.64,84.92 89.55,84.94 89.45,84.96 89.37,84.98 89.28,85.02 89.21,85.05 89.18,85.1 89.19,85.17 89.2,85.19 89.22,85.21 89.24,85.22 89.28,85.23 90.61,85.23 90.65,85.24 90.67,85.25 90.69,85.27 90.7,85.29 90.71,85.33 90.71,86.43 90.7,86.47 90.69,86.49 90.67,86.51 90.65,86.52 90.61,86.53 89,86.53 88.96,86.52 88.94,86.51 88.92,86.49 88.91,86.47 88.9,86.43 88.9,85.54 88.9,85.5 88.88,85.48 88.86,85.46 88.84,85.45 88.78,85.44 88.73,85.47 88.69,85.53 88.64,85.62 88.6,85.71 88.57,85.81 88.54,85.9 88.52,86 88.51,86.1 88.51,86.2 88.52,86.31 88.53,86.41 88.55,86.5 88.58,86.6 88.62,86.7 88.66,86.79 88.71,86.87 88.77,86.96 93.93,86.96 93.93,85.35 93.94,85.31 93.95,85.29 93.97,85.27 93.99,85.26 94.03,85.25 95.13,85.25 95.17,85.26 95.19,85.27 95.21,85.29 95.22,85.31 95.23,85.35 95.23,86.96 95.22,87 95.21,87.02 95.19,87.04 95.17,87.05 95.13,87.06 94.03,87.06 93.99,87.05 93.97,87.04 93.95,87.02 93.94,87 93.93,86.96 88.77,86.96 88.84,87.04 88.91,87.11 88.98,87.17 89.06,87.23 89.15,87.29 89.24,87.34 89.33,87.37 89.43,87.41 89.53,87.43 89.63,87.45 89.73,87.45 89.78,87.45
N200865 on TOP: 94.85,110.28 95.23,109.38 96.12,109 99.3,109 100.2,109.38 100.57,110.28 100.57,122.34 100.2,123.24 99.3,123.61 96.12,123.61 95.23,123.24 94.85,122.34
N201462 on TOP: 60.4,8.7 60.05,8.55 59.9,8.2 59.9,4 60.05,3.65 60.4,3.5 69.6,3.5 69.95,3.65 70.1,4 70.1,8.2 69.95,8.55 69.6,8.7
N205115 on TOP: 20.56,100.75 20.93,99.85 21.83,99.48 25.64,99.48 26.54,99.85 26.91,100.75 26.91,102.02 26.54,102.92 25.64,103.29 21.83,103.29 20.93,102.92 20.56,102.02
N230446 on TOP: 49.31,226.5 48.96,226.35 48.81,226 48.81,217.25 48.96,216.9 49.31,216.75 51.31,216.75 51.66,216.9 51.81,217.25 51.81,218 51.96,218.35 52.31,218.5 63.81,218.5 64.16,218.65 64.31,219 64.31,226 64.16,226.35 63.81,226.5
N230446 on BOTTOM: 49.3,226.5 48.95,226.35 48.8,226 48.8,217.25 48.95,216.9 49.3,216.75 51.3,216.75 51.65,216.9 51.8,217.25 51.8,218 51.95,218.35 52.3,218.5 63.8,218.5 64.15,218.65 64.3,219 64.3,226 64.15,226.35 63.8,226.5
N230450 on TOP: 48.79,204.02 48.94,203.67 49.29,203.52 63.79,203.52 64.14,203.67 64.29,204.02 64.29,211.02 64.14,211.37 63.79,211.52 52.29,211.52 51.94,211.67 51.79,212.02 51.79,212.77 51.64,213.12 51.29,213.27 49.29,213.27 48.94,213.12 48.79,212.77
N230450 on BOTTOM: 48.8,204 48.95,203.65 49.3,203.5 63.8,203.5 64.15,203.65 64.3,204 64.3,211 64.15,211.35 63.8,211.5 52.3,211.5 51.95,211.65 51.8,212 51.8,212.75 51.65,213.1 51.3,213.25 49.3,213.25 48.95,213.1 48.8,212.75
N230454 on TOP: 27.8,211.5 27.45,211.35 27.3,211 27.3,204 27.45,203.65 27.8,203.5 42.3,203.5 42.65,203.65 42.8,204 42.8,212.75 42.65,213.1 42.3,213.25 40.3,213.25 39.95,213.1 39.8,212.75 39.8,212 39.65,211.65 39.3,211.5 35.55,211.5 35.55,212.75 32.05,212.75 32.05,211.5
N230454 on BOTTOM: 27.8,211.5 27.45,211.35 27.3,211 27.3,204 27.45,203.65 27.8,203.5 42.3,203.5 42.65,203.65 42.8,204 42.8,212.75 42.65,213.1 42.3,213.25 40.3,213.25 39.95,213.1 39.8,212.75 39.8,212 39.65,211.65 39.3,211.5
GND on BOTTOM (solid shape): 97.61,87.45 98.26,87.17 98.5,86.5 98.5,82.7 98.32,82.12 97.84,81.75 97.81,81.74 87.88,81.74 86.98,82.11 86.6,83.01 86.6,86.19 86.98,87.08 87.88,87.45
(no net) on TOP: 85.97,81.74 85.07,82.11 84.7,83.01 84.7,87.45 85.07,88.35 85.97,88.72 87.24,88.72 88.14,88.35 88.51,87.45 88.51,84.28 95.49,84.28 96.77,83.01 95.49,81.74

## Text on the board
Ref Des/Silkscreen Top: 3.140.280 | December 2016 | BP2_02v5
ASSEMBLY_TOP: 3.140.280 | December 2016 | BP2_02v5
